# Altium PCB radio_pcb.PcbDoc
Units mil, origin at the board's own origin, x right, y up, seen from the top; angles counter-clockwise.
Board outline 3150 x 1770 mil, 2 copper layers (Top Layer, Bottom Layer); 49 components, 48 nets, 274 pads, 37 vias.
Unrouted connection lines stored in the file: 64.
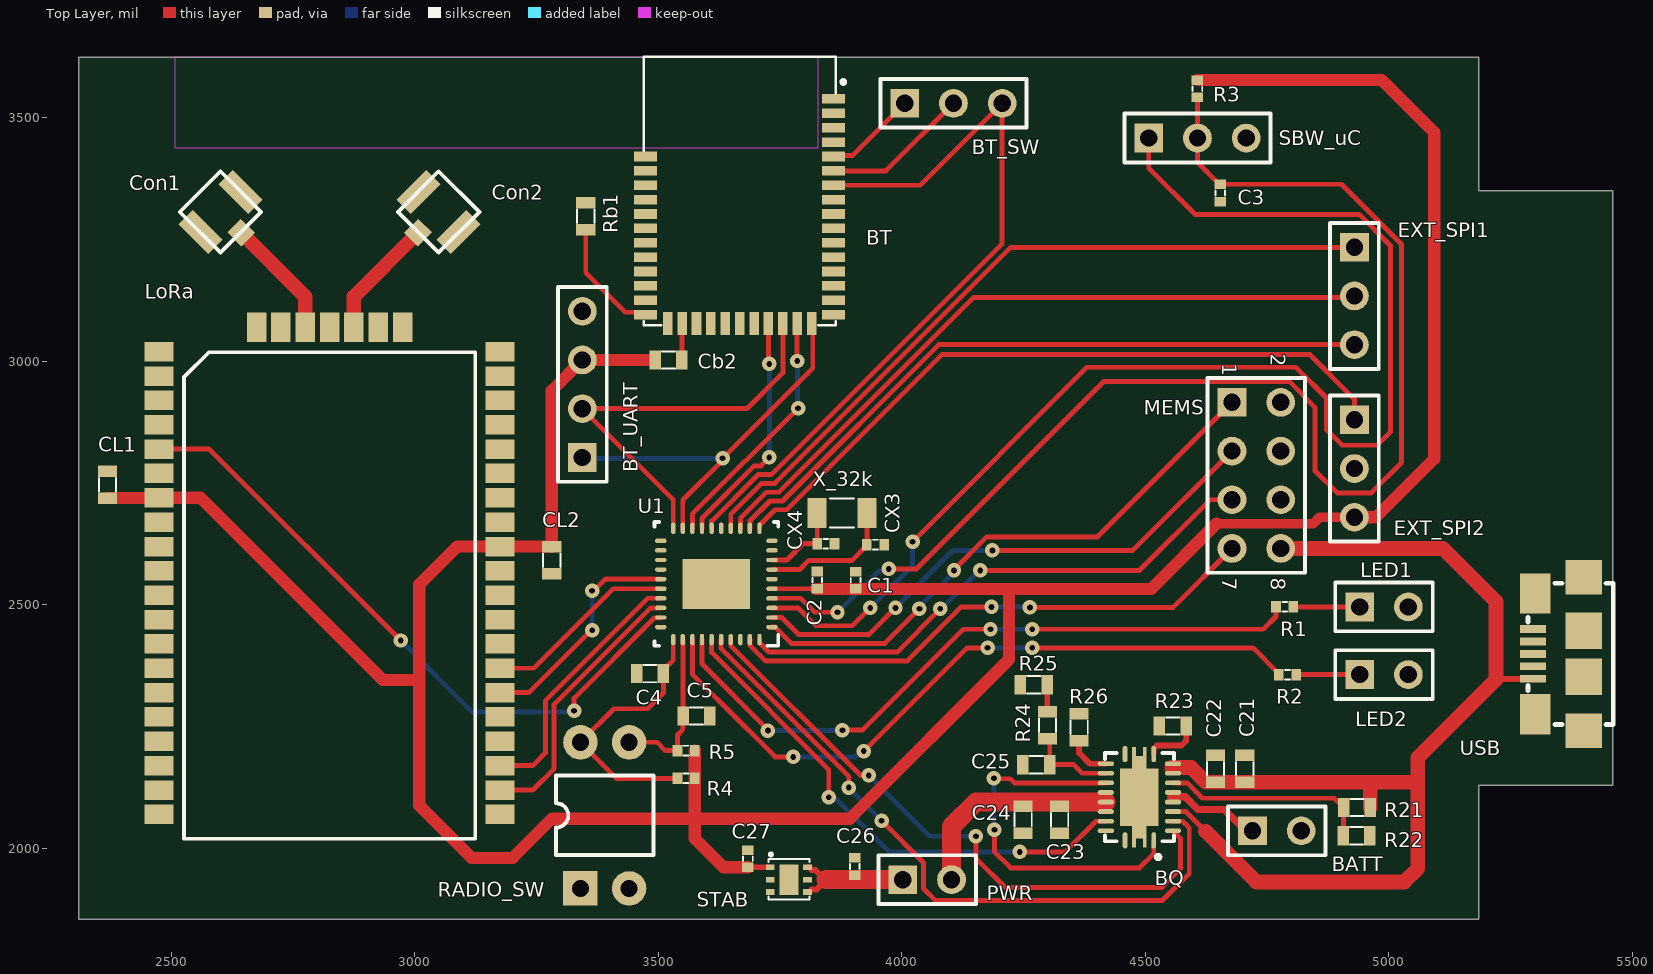
[diagram p0: Top Layer view]
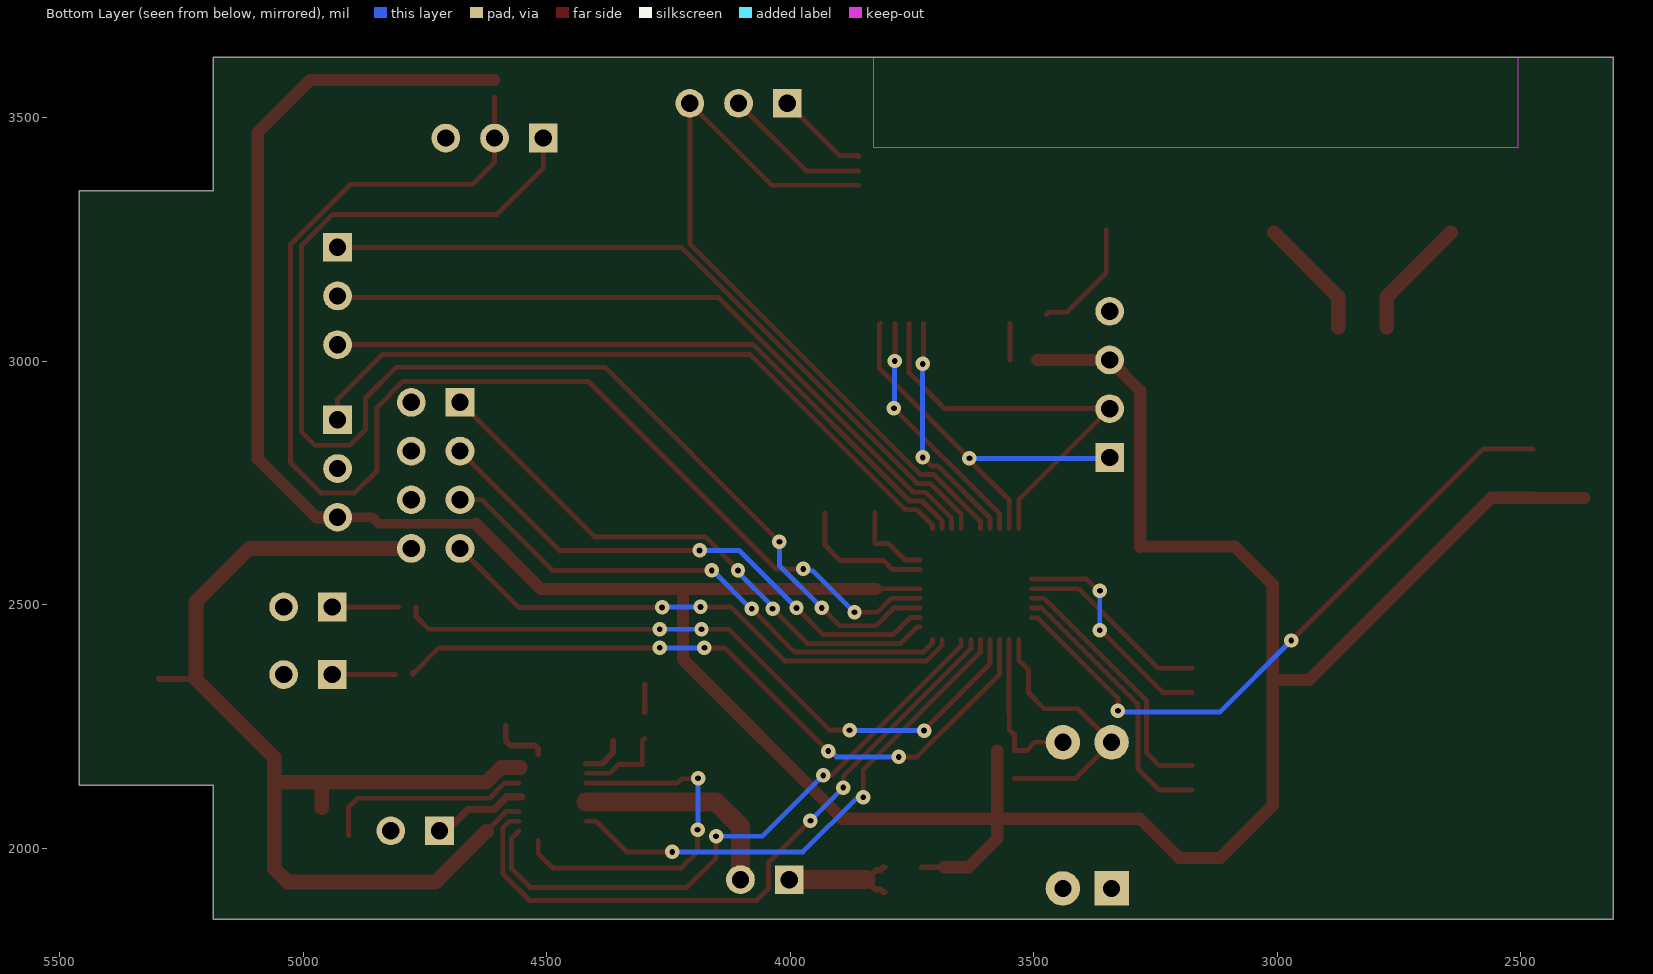
[diagram p1: Bottom Layer view, seen from below]

## Layer stack, top to bottom
Top Solder: solder mask 0.4, Solder Resist, Dk 3.5
Top Layer: signal copper 1.4
Dielectric 1: dielectric 12.6, FR-4, Dk 4.8
Bottom Layer: signal copper 1.4
Bottom Solder: solder mask 0.4, Solder Resist, Dk 3.5

## Board outline
2310,3625 2310,1855 5185,1855 5185,2130 5460,2130 5460,3350 5185,3350 5185,3625

## Design rules (kind name [scope] priority, off if disabled: settings)
Clearance [All] p1: gap=8 ignorepadtopadclearanceinfootprint=FALSE except(0: Arc-Hole Track-Hole SMDPad-Hole THPad-Hole Via-Hole Fill-Hole Poly-Hole Region-Hole Text-Hole)
PolygonConnect [All] p1: connectstyle=Direct reliefconductorwidth=10 reliefentries=4 polygonreliefangle="90 Angle" airgapwidth=10
RoomDefinition uC_radio [InComponentClass('uC_radio')] p1: confinementstyle=ConfineOut formatcopy=TRUE lockcomponents=FALSE outline 5921,4004 6604,4004 6604,4432 5921,4432
RoomDefinition radio [InComponentClass('radio')] p2: confinementstyle=ConfineOut formatcopy=TRUE lockcomponents=FALSE outline 6721,3759 7971,3759 7971,4449 6721,4449
RoomDefinition pwr_supply [InComponentClass('pwr_supply')] p3: confinementstyle=ConfineOut formatcopy=TRUE lockcomponents=FALSE outline 5724,3616 6669,3616 6669,3936 5724,3936
RoutingVias [All] p1: holewidth=11.81 width=29.53 viastyle="Through Hole" minholewidth=11.81 minwidth=29.53 maxholewidth=28 maxwidth=50
SolderMaskExpansion [All] p1: expansion=4
Width [All] p1: maxlimit=50 minlimit=10 preferedwidth=10 minimp=50.000000 maximp=50.000000 favimp=50.000000
30 further rules are at their usual default settings.

## Classes and differential pairs
component class uC_radio: C1 C2 C3 C4 C5 CX3 CX4 EXT_SPI1 EXT_SPI2 LED1 LED2 MEMS R1 R2 R3 R4 R5 RADIO_SW SBW_uC U1 X_32k
component class pwr_supply: BATT BQ C21 C22 C23 C24 C25 C26 C27 PWR R21 R22 R23 R24 R25 R26 STAB USB
component class radio: BT BT_SW BT_UART Cb2 CL1 CL2 Con1 Con2 LoRa Rb1

## Components (designator, comment, footprint, x,y, rotation, side; value= is the part's Value field where it differs from the comment)
BATT "Batt" HDR1X2 4720,2036.21 r0 top
BQ "BQ24070" BQ24070 4487.78,2105.23 r90 top
BT "BL652_Solder_PAD_P39" XCVR_BL652-SA-01 3667,3350 r0 top
BT_SW "" HDR1X3 4006,3530 r0 top
BT_UART "Header 4" HDR1X4 3344,2803 r90 top
C1 "10u" 402 3905,2550.72 r270 top
C2 "100n" 402 3826,2551 r270 top
C3 "1n" 402 4654,3346 r90 top
C4 "C" 603 3483,2359 r180 top
C5 "C" 603 3578.42,2272 r0 top
C21 "10u" 603 4704,2163.77 r90 top
C22 "0.1u" 603 4644,2163.77 r90 top
C23 "0.1u" 603 4324,2058.77 r90 top
C24 "10u" 603 4249,2058.77 r90 top
C25 "10n" 603 4276,2172 r0 top
C26 "10u" 402 3903,1963 r270 top
C27 "10u" 402 3684,1979 r270 top
Cb2 "1u" 603 3521,3003 r0 top
CL1 "1u" 603 2369,2747 r90 top
CL2 "1u" 603 3281,2592 r90 top
Con1 "RFL" IPEX 2600.98,3307.09 r315 top
Con2 "RFH" IPEX 3049,3307.09 r225 top
CX3 "12p" 402 3946,2624 r180 top
CX4 "12p" 402 3844,2626 r180 top
EXT_SPI1 "" HDR1X3 4929.21,3234.41 r270 top locked
EXT_SPI2 "" HDR1X3 4929.21,2880.08 r270 top locked
LED1 "Header 2" HDR1X2 4940,2496 r0 top
LED2 "Header 2" HDR1X2 4940,2357 r0 top
LoRa "LORA module" RN2483 2825,2570 r0 top
MEMS "Header 4X2" HDR2X4 4677.88,2916 r270 top
PWR "" HDR1X2 4002,1936 r0 top
R1 "R" 402 4786,2496 r0 top
R2 "R" 402 4792,2357 r0 top
R3 "47k" 402 4607,3560.04 r90 top
R4 "R" 402 3557,2144 r0 top
R5 "R" 402 3557,2201 r0 top
R21 "R" 603 4934.56,2084.21 r0 top
R22 "R" 603 4933.56,2026.21 r0 top
R23 "10k" 603 4556.44,2251.33 r0 top
R24 "2k7" 603 4299,2253 r270 top
R25 "33k" 603 4271,2336 r0 top
R26 "10k" 603 4364,2248.89 r270 top
RADIO_SW "DIPS-D02" DIPS-02 3340,1918 r90 top
Rb1 "R" 603 3351,3298 r270 top
SBW_uC "Header 3" HDR1X3 4507,3458.76 r0 top
STAB "LP5912" WSON-6 3768,1936 r0 top
U1 "MSP430FR2155TRHA" RHA0040E_NV 3619.16,2543.17 r180 top value=Value
USB "USB Micro Type B" USB_Micro-B 5295.67,2399.45 r90 top
X_32k "CRYST_32k768" "CRYST 32.768 kHz" 3877,2689 r180 top

## Footprints (in the part's own frame and the unit in brackets; to place one, negate y for a bottom-side part, rotate by r counter-clockwise, add the part's x,y. Pads: shape width x height; smd on the part's side, far side on the other; paste and mask are expansions set on the pad)
402 [mm]
  rect 0.5x0.6 smd: 1(-0.45,0) 2(0.45,0)
  silkscreen extent -0.13,-0.25 0.13,0.25
603 [mm]
  rect 0.6x1 smd: 1(-0.7,0) 2(0.7,0)
  silkscreen extent -0.35,-0.45 0.35,0.45
BQ24070 [mm]
  oval 0.85x0.25 smd: 1(-2.25,-0.75) 10(2.25,-0.75) 11(2.25,0.75) 20(-2.25,0.75)
  oval 0.25x0.85 smd: 2(-1.75,-1.75) 3(-1.25,-1.75) 4(-0.75,-1.75) 5(-0.25,-1.75) 6(0.25,-1.75) 7(0.75,-1.75) 8(1.25,-1.75) 9(1.75,-1.75) 12(1.75,1.75) 13(1.25,1.75) 14(0.75,1.75) 15(0.25,1.75) 16(-0.25,1.75) 17(-0.75,1.75) 18(-1.25,1.75) 19(-1.75,1.75)
  rect 0.9x0.2 smd: 21(-2.175,-0.275) 21(-2.175,0.275) 21(2.175,-0.275) 21(2.175,0.275)
  rect 0.7x0.75 smd: 21(-1.8,0) 21(1.8,0)
  rect 3x2 smd: 21(0,0)
  silkscreen extent -3.21,-1.8 2.3,1.8
"CRYST 32.768 kHz" [mm]
  rect 1x1.55 smd: 1(-1.3,0) 2(1.3,0)
  silkscreen extent -0.64,-0.76 0.64,0.76
DIPS-02 [mm]
  rect 1.8x1.8 / inner rect 2.5x1.2 / far side rect 1.8x1.8 hole 0.9: 1(0,0)
  round 1.8 / inner oval 2.5x1.2 / far side round 1.8 hole 0.9: 2(0,-2.54) 3(7.62,-2.54) 4(7.62,0)
  silkscreen extent 1.73,-3.81 5.89,1.27
HDR1X2 [mm] "Connector; Header; 2 Position"
  rect 1.5x1.5 hole 0.9: 1(0,0)
  round 1.5 hole 0.9: 2(2.54,0)
  silkscreen extent -1.27,-1.27 3.81,1.27
HDR1X3 [mm] "Connector; Header; 3 Position"
  rect 1.5x1.5 hole 0.9: 1(0,0)
  round 1.5 hole 0.9: 2(2.54,0) 3(5.08,0)
  silkscreen extent -1.27,-1.27 6.35,1.27
HDR1X4 [mm] "Connector; Header; 4 Position"
  rect 1.5x1.5 hole 0.9: 1(0,0)
  round 1.5 hole 0.9: 2(2.54,0) 3(5.08,0) 4(7.62,0)
  silkscreen extent -1.27,-1.27 8.89,1.27
HDR2X4 [mm] "Connector; Header; 4x2 Position"
  rect 1.5x1.5 hole 0.9: 1(0,0)
  round 1.5 hole 0.9: 2(0,2.54) 3(2.54,0) 4(2.54,2.54) 5(5.08,0) 6(5.08,2.54) 7(7.62,0) 8(7.62,2.54)
  silkscreen extent -1.27,-1.27 8.89,3.81
IPEX [mm]
  rect 1.05x1 smd: 1(1.525,0)
  rect 2.2x1.05 smd: 2(0,1.475) 3(0,-1.475)
  silkscreen extent -1.5,-1.5 1.5,1.5
RHA0040E_NV [mm]
  oval 0.6x0.23 smd paste+0 mask+0.076: 1(-2.9,2.25) 2(-2.9,1.75) 3(-2.9,1.25) 4(-2.9,0.75) 5(-2.9,0.25) 6(-2.9,-0.25) 7(-2.9,-0.75) 8(-2.9,-1.25) 9(-2.9,-1.75) 10(-2.9,-2.25) 21(2.9,-2.25) 22(2.9,-1.75) 23(2.9,-1.25) 24(2.9,-0.75) 25(2.9,-0.25) 26(2.9,0.25) 27(2.9,0.75) 28(2.9,1.25) 29(2.9,1.75) 30(2.9,2.25)
  oval 0.23x0.6 smd paste+0 mask+0.076: 11(-2.25,-2.9) 12(-1.75,-2.9) 13(-1.25,-2.9) 14(-0.75,-2.9) 15(-0.25,-2.9) 16(0.25,-2.9) 17(0.75,-2.9) 18(1.25,-2.9) 19(1.75,-2.9) 20(2.25,-2.9) 31(2.25,2.9) 32(1.75,2.9) 33(1.25,2.9) 34(0.75,2.9) 35(0.25,2.9) 36(-0.25,2.9) 37(-0.75,2.9) 38(-1.25,2.9) 39(-1.75,2.9) 40(-2.25,2.9)
  rect 3.52x2.62 smd paste-1.747 mask+0: 41(0,0)
  silkscreen extent -3.22,-3.22 3.22,3.22, body extent 0,0 0.25,0.25, height 0.25
RN2483 [mil]
  rect 60x40 smd: 1(350,-500) 2(350,-450) 3(350,-400) 4(350,-350) 5(350,-300) 6(350,-250) 7(350,-200) 8(350,-150) 9(350,-100) 10(350,-50) 11(350,0) 12(350,50) 13(350,100) 14(350,150) 15(350,200) 16(350,250) 17(350,300) 18(350,350) 19(350,400) 20(350,450) 28(-350,450) 29(-350,400) 30(-350,350) 31(-350,300) 32(-350,250) 33(-350,200) 34(-350,150) 35(-350,100) 36(-350,50) 37(-350,0) 38(-350,-50) 39(-350,-100) 40(-350,-150) 41(-350,-200) 42(-350,-250) 43(-350,-300) 44(-350,-350) 45(-350,-400) 46(-350,-450) 47(-350,-500)
  rect 40x60 smd: 21(150,500) 22(100,500) 23(50,500) 24(0,500) 25(-50,500) 26(-100,500) 27(-150,500)
  silkscreen extent -299,-550 299,449
USB_Micro-B [mm]
  rect 0.4x1.35 smd: 1(-1.3,0) 2(-0.65,0) 3(0,0) 4(0.65,0) 5(1.3,0)
  rect 1.8x1.9 smd: SH(-4,-2.65) SH(4,-2.65)
  rect 2.1x1.6 smd: SH(-3.15,-0.127) SH(3.15,-0.127)
  rect 1.9x1.9 smd: SH(-1.2,-2.65) SH(1.2,-2.65)
  silkscreen extent -3.68,-4.19 3.68,0.25
WSON-6 [mm]
  rect 0.45x0.3 smd: 1(-0.975,0.65) 2(-0.975,0) 3(-0.975,-0.65) 4(0.975,-0.65) 5(0.975,0) 6(0.975,0.65)
  rect 1x1.6 smd: 7(0,0)
  silkscreen extent -1.07,-1.04 1.07,1.4
XCVR_BL652-SA-01 [mm]
  rect 1.2x0.5 smd: 1(4.9,4.8) 2(4.9,4.05) 3(4.9,3.3) 4(4.9,2.55) 5(4.9,1.8) 6(4.9,1.05) 7(4.9,0.3) 8(4.9,-0.45) 9(4.9,-1.2) 10(4.9,-1.95) 11(4.9,-2.7) 12(4.9,-3.45) 13(4.9,-4.2) 14(4.9,-4.95) 15(4.9,-5.7) 16(4.9,-6.45) 28(-4.9,-6.45) 29(-4.9,-5.7) 30(-4.9,-4.95) 31(-4.9,-4.2) 32(-4.9,-3.45) 33(-4.9,-2.7) 34(-4.9,-1.95) 35(-4.9,-1.2) 36(-4.9,-0.45) 37(-4.9,0.3) 38(-4.9,1.05) 39(-4.9,1.8)
  rect 0.5x1.2 smd: 17(3.75,-6.9) 18(3,-6.9) 19(2.25,-6.9) 20(1.5,-6.9) 21(0.75,-6.9) 22(0,-6.9) 23(-0.75,-6.9) 24(-1.5,-6.9) 25(-2.25,-6.9) 26(-3,-6.9) 27(-3.75,-6.9)
  silkscreen extent -5,-7 5.51,7

## Part data
BATT PWR: library part "Header 2", "Header, 2-Pin", LatestRevisionDate=17-Jul-2002, LatestRevisionNote="Re-released for DXP Platform.", Publisher="Altium Limited"
BT: "BL652 Solder PAD", E Number=?
BT_SW EXT_SPI1 EXT_SPI2: library part "Header 3", "Header, 3-Pin", LatestRevisionDate=17-Jul-2002, LatestRevisionNote="Re-released for DXP Platform.", Publisher="Altium Limited"
BT_UART: "Header, 4-Pin", LatestRevisionDate=17-Jul-2002, LatestRevisionNote="Re-released for DXP Platform.", Publisher="Altium Limited"
C1 C2 C3 C21 C22 C23 C24 C25 C26 C27 Cb2 CL1 CL2 CX3 CX4: library part C, "Capacitor"
C4 C5: "Capacitor"
Con1 Con2: library part IPEX/U.FL, "SMA PCB Edge Receptacle"
LED1 LED2: "Header, 2-Pin", LatestRevisionDate=17-Jul-2002, LatestRevisionNote="Re-released for DXP Platform.", Publisher="Altium Limited"
LoRa: library part Lora
MEMS: "Header, 4-Pin, Dual row", LatestRevisionDate=17-Jul-2002, LatestRevisionNote="Re-released for DXP Platform.", Publisher="Altium Limited"
R1 R2 R4 R5 R21 R22 Rb1: "Resistor"
R3 R23 R24 R25 R26: library part R, "Resistor"
SBW_uC: "Header, 3-Pin", LatestRevisionDate=17-Jul-2002, LatestRevisionNote="Re-released for DXP Platform.", Publisher="Altium Limited"
U1: "Imported", Manufacturer="Texas Instruments", PartNumber=MSP430FR2355TRHAR, RefDes=RefDes, TYPE=TYPE
USB: library part USB_Micro_TypeB, "Connector SMD USB Micro Type B middle mount", Manufacturer 1="Molex Inc", Package / Case=SMD, Supplier Part Number 1=WM17142CT-ND, SCDType=undef, Supplier 1=Digi-Key

## Via types
v1: diameter 29.53, hole 11.81, Top Layer to Bottom Layer, 37 vias

## Nets (pads, with @x,y where several pads share a name; then routed paths per layer and width w, separated by ;. In a path a pad name is that pad's centre, name@x,y a point inside that pad or via, vN(x,y) a via of type N, cw(c..) or ccw(c..) an arc to the next point about the centre after c; other vN are vias at no path point)
BATT: BATT.1 BQ.5 BQ.6 | length 197
  Top Layer w15: 4552,2106.21 4581.88,2106.21 4607.88,2080.21 4662,2080.21 BATT.1@4706,2036.21
  Top Layer w25: BATT.1@4706,2036.21 BATT.1
BQ_PG: BQ.18 U1.35 | length 1064.9
  Top Layer w10: U1.35 3609.32,2402.68 3850,2162 v1(3850,2105.23) ; v1(4242,1993) 4335.67,1993 4398.68,2056.01 BQ.18
  Bottom Layer w10: v1(3850,2105.23) 3861.51,2105.23 3973.74,1993 v1(4242,1993)
BQ_STAT1: BQ.2 U1.37 | length 1268
  Top Layer w10: U1.37 3648.69,2416.39 3915.07,2150 v1(3932,2150) ; v1(4152,2025) 4152,1980 4211.79,1920.21 4534,1920.21 4572,1958.21 4572,2021.01 BQ.2
  Bottom Layer w10: v1(3932,2150) 4057,2025 v1(4152,2025)
BQ_STAT2: BQ.3 U1.36 | length 1394.8
  Top Layer w10: U1.36 3629,2410 3891,2148 v1(3891,2125) ; v1(3958.44,2057) 4044.53,1970.91 4044.53,1917.47 4068.53,1893.47 4535.26,1893.47 4590,1948.21 4590,2042.21 4576.2,2056.01 BQ.3
  Bottom Layer w10: v1(3891,2125) 3891,2124.44 v1(3958.44,2057)
BT_CTS: BT.18 U1.18 | length 511.8
  Top Layer w10: U1.18 3569.94,2686.94 v1(3787,2904) ; v1(3785,3001) 3785.06,3001.06 BT.18 BT.18
  Bottom Layer w10: v1(3785,3001) 3786,3000 3786,2905 v1(3787,2904)
BT_MSP_RXD: BT.19 BT_UART.2 U1.20 | length 867
  Top Layer w10: U1.20 3530.57,2716.43 BT_UART.2 3682.15,2903 3755.76,2976.61 3755.76,3078.17 BT.19
BT_MSP_TXD: BT.17 BT_UART.1 U1.19 | length 821.3
  Top Layer w10: U1.19 3550.26,2715.47 3632,2797.21 v1(3632,2801) 3817,2986 3817,3075.98 BT.17
  Bottom Layer w10: BT_UART.1 3346,2801 v1(3632,2801)
BT_RESET: BT.7 BT_SW.3 U1.16 | length 1551.5
  Top Layer w10: U1.16 3609.32,2672.23 3704.59,2767.5 3731.76,2767.5 4206,3241.74 BT_SW.3 4037.81,3361.81 BT.7
BT_RTS: BT.20 U1.17 | length 487
  Top Layer w10: U1.17 3589.63,2678 3697.13,2785.5 3710.5,2785.5 v1(3728,2803) ; BT.20 3726.06,2996.94 v1(3728,2995)
  Bottom Layer w10: v1(3728,2803) v1(3728,2995)
BT_SWDCLK: BT.6 BT_SW.2 | length 303.5
  Top Layer w10: BT.6 3967.34,3391.34 BT_SW.2
BT_SWDIO: BT.5 BT_SW.1 | length 191.3
  Top Layer w10: BT.5 3861.58,3422.54 3898.54,3422.54 BT_SW.1
EXT_SPI_CLK: EXT_SPI1.2 U1.13 | length 1470.6
  Top Layer w10: U1.13 3668.37,2678.1 3721.77,2731.5 3747.5,2731.5 4147,3131 4925.8,3131 EXT_SPI1.2
EXT_SPI_MISO: EXT_SPI2.1 U1.11 | length 1453.4
  Top Layer w10: U1.11 3707.74,2663.68 3739.56,2695.5 3763.74,2695.5 4082.24,3014 4838,3014 4929.21,2922.79 EXT_SPI2.1
EXT_SPI_MOSI: EXT_SPI1.3 U1.12 | length 1406.1
  Top Layer w10: U1.12 3688.06,2672.33 3729.22,2713.5 3754.96,2713.5 4075.87,3034.41 EXT_SPI1.3
EXT_SPI_STE: EXT_SPI1.1 U1.14 | length 1536.4
  Top Layer w10: U1.14 3648.69,2686.14 3712.04,2749.5 3739.22,2749.5 4223.93,3234.21 4929.01,3234.21 EXT_SPI1.1
GND: BATT.2 BQ.11 BQ.19 BQ.20 BQ.21 BT.1 BT.16 BT.27 BT.39 BT_UART.4 C1.1 C2.1 C3.1 C4.2 C5.2 C21.2 C22.2 C23.1 C24.1 C25.1 C26.1 C27.1 CL1.2 CL2.1 Con1.2 Con1.3 Con2.2 Con2.3 CX3.1 CX4.1 EXT_SPI2.2 LED1.2 LED2.2 LoRa.1 LoRa.8 LoRa.11 LoRa.20 LoRa.21 LoRa.22 LoRa.24 LoRa.26 LoRa.27 LoRa.28 LoRa.33 LoRa.41 LoRa.47 MEMS.2 MEMS.4 MEMS.6 R22.2 R23.1 R25.1 R26.1 RADIO_SW.1 RADIO_SW.2 Rb1.1 SBW_uC.3 STAB.2 STAB.5 STAB.7 U1.6 U1.41 USB.5 USB.SH
LED1: R1.1 U1.34 | length 1403.1
  Top Layer w10: U1.34 3589.63,2379.37 3725,2244 v1(3725,2242) ; v1(3878,2243) 3919,2243 4126,2450 v1(4182,2450) ; v1(4268,2450) 4742,2450 4768.28,2476.28 R1.1
  Bottom Layer w10: v1(3725,2242) 3877,2242 v1(3878,2243) ; v1(4182,2450) v1(4268,2450)
LED2: R2.1 U1.33 | length 1464.6
  Top Layer w10: U1.33 3569.94,2357.79 3623.05,2304.69 3623.17,2304.69 3630.79,2297.07 3630.79,2296.95 3739.74,2188 v1(3777,2188) ; v1(3922,2200) 4134,2412 v1(4176,2412) ; v1(4268,2412) 4721.25,2412 4774.28,2358.97 R2.1 ; R2.1@4773.47,2361.84 R2.1@4775.44,2361.84
  Bottom Layer w10: v1(3777,2188) 3904.72,2188 3916.72,2200 v1(3922,2200) ; v1(4176,2412) v1(4268,2412)
LORA_CTS: LoRa.3 U1.27 | length 535.1
  Top Layer w10: LoRa.3 3242,2170 3268,2196 3268,2303.19 3478.46,2513.65 U1.27
LORA_MSP_RXD: LoRa.6 U1.25 | length 474.7
  Top Layer w10: LoRa.6 3234,2320 3362,2448 v1(3364.5,2448) ; v1(3364,2529) 3367,2529 3391.02,2553.02 U1.25
  Bottom Layer w10: v1(3364,2529) 3364.25,2528.75 3364.25,2448.25 v1(3364.5,2448)
LORA_MSP_TXD: LoRa.7 U1.26 | length 397.6
  Top Layer w10: LoRa.7 3244.26,2370 3407.59,2533.33 U1.26
LORA_RESET: LoRa.32 U1.29 | length 1344.9
  Top Layer w10: LoRa.32 2578,2820 v1(2971,2427) ; v1(3327,2283) 3327,2308.68 3492.13,2473.8 3504.51,2473.8 U1.29
  Bottom Layer w10: v1(2971,2427) 3118,2280 v1@3324,2280
LORA_RTS: LoRa.2 U1.28 | length 562.1
  Top Layer w10: LoRa.2 3242,2120 3286,2164 3286,2295.73 3484.23,2493.96 U1.28
NetBQ_7: BQ.7 R21.1 R22.1 | length 429.7
  Top Layer w10: BQ.7 4585.86,2134.75 4617.4,2103.21 4888,2103.21 R21.1 4907,2027.21 R22.1
NetBQ_10: BQ.10 R23.2 | length 114.4
  Top Layer w12: BQ.10 4517.31,2204.52 4524,2211.21 4574,2211.21 4584,2221.21 R23.2
NetBQ_12: BQ.12 R26.2 | length 89.1
  Top Layer w12: R26.2 4364,2196.21 4386.09,2174.12 BQ.12
NetBQ_13: BQ.13 C25.2 R24.2 | length 178.6
  Top Layer w10: R24.2 4303.56,2220.88 C25.2@4303.56,2172.21 ; C25.2@4303,2172.21 C25.2@4303.56,2172.21 ; C25.2 C25.2@4303.56,2172.21 ; BQ.13 4370.77,2154.44 4353,2172.21 C25.2@4303.56,2172.21
NetBT_26: BT.26 Cb2.2 | length 76.3
  Top Layer w10: Cb2.2@3548.83,3002.72 Cb2.2 3548.72,3003.17 3548.72,3078.18 BT.26 BT.26@3549.17,3078.07
NetBT_28: BT.28 Rb1.2 | length 247.1
  Top Layer w10: Rb1.2 3351,3182 3432.09,3100.91 3469.24,3100.91 BT.28
NetCon1_1: Con1.1 LoRa.25 | length 249.1
  Top Layer w29.53: Con1.1 2775,3133.07 LoRa.25
NetCon2_1: Con2.1 LoRa.23 | length 249.1
  Top Layer w29.53: LoRa.23 2875,3133.09 Con2.1
NetLED1_1: LED1.1 R1.2 | length 136.3
  Top Layer w10: R1.2 LED1.1
NetLED2_1: LED2.1 R2.2 | length 130.3
  Top Layer w10: R2.2 LED2.1
NetR24_1: R24.1 R25.2 | length 55.6
  Top Layer w12: R25.2 4298.56,2281 R24.1
PS_VCC: BQ.4 BQ.8 BQ.9 C21.1 C22.1 MEMS.8 R21.2 USB.1 | length 2315.8
  Top Layer w10: BQ.4 4583.4,2075.7 4623.55,2035.55
  Top Layer w12: 5220,2347.21 5221.06,2348.27 USB.1
  Top Layer w30: 4554,2166.21 4594,2166.21 4624,2136.21 C22.1 C21.1 5059,2136.21 ; 4623.55,2035.55 4727.88,1931.21 5032,1931.21 5059,1958.21 5059,2136.21 ; MEMS.8 5111,2616 5220,2507 5220,2347.21 5059,2186.21 5059,2136.21 ; R21.2 4962.12,2130.33
RADIO_SEL1: C5.1 R5.1 RADIO_SW.3 U1.32 | length 339
  Top Layer w10: RADIO_SW.3 3497.44,2218 3514.44,2201 R5.1 3539.28,2233.02 3550.26,2244 3550.26,2275.26 3550.44,2275.44 3550.35,2275.53 3550.35,2428.91 U1.32
RADIO_SEL2: C4.1 R4.1 RADIO_SW.4 U1.31 | length 560.3
  Top Layer w10: U1.31 3530.57,2386.89 3510.56,2366.87 C4.1 3510.56,2319.57 3477.96,2286.98 3408.98,2286.98 RADIO_SW.4 3414,2144 R4.1
RST_SBWTDIO: C3.2 R3.1 SBW_uC.2 U1.4 | length 2768.4
  Top Layer w10: U1.4 3792.53,2513.65 3821.17,2485 v1(3868,2485) ; v1(3973,2574) 4030,2574 4415,2959 4795.03,2959 4848,2906.03 4848,2776 4894,2730 4964,2730 5026,2792 5026,3240.52 4902.81,3363.72 C3.2 4652.03,3363.72 4607,3408.75 SBW_uC.2 R3.1
  Bottom Layer w10: v1(3868,2485) 3953.26,2570.26 3969.26,2570.26 v1(3973,2574)
SBWTCK: SBW_uC.1 U1.3 | length 2655.9
  Top Layer w10: U1.3 3786.76,2493.96 3823.48,2457.24 3898.24,2457.24 v1(3935,2494) ; v1(4022,2630) 4380,2988 4809,2988 4872,2925 4872,2859.86 4903.86,2828 4976.24,2828 5003,2854.76 5003,3238.07 4939.07,3302 4602,3302 4507,3397 SBW_uC.1
  Bottom Layer w10: v1(3935,2494) 4022,2581 v1(4022,2630)
SENS_SPI_CLK: MEMS.1 U1.1 | length 1168.8
  Top Layer w10: U1.1 3739.67,2454.59 3773.02,2421.24 3965.24,2421.24 v1(4036,2492) ; v1(4107,2571) 4107,2572.33 4174.5,2639.83 4401.72,2639.83 MEMS.1
  Bottom Layer w10: v1(4036,2492) 4036,2496 4107,2567 v1(4107,2571)
SENS_SPI_MISO: MEMS.7 U1.39 | length 1110.6
  Top Layer w10: U1.39 3688.53,2428.53 3688.53,2416.14 3719.43,2385.24 4011.5,2385.24 4122.26,2496 v1(4184,2496) ; v1(4263,2495) 4556.88,2495 MEMS.7
  Bottom Layer w10: v1@4185,2495 4185.5,2495.5 4262.5,2495.5 v1(4263,2495)
SENS_SPI_MOSI: MEMS.5 U1.40 | length 1114.1
  Top Layer w10: U1.40 3707.74,2422.66 3727.17,2403.24 3990.24,2403.24 v1(4079,2492) ; v1(4161,2571) 4488,2571 4633,2716 MEMS.5
  Bottom Layer w10: v1(4079,2492) 4080.5,2492 4159.5,2571 v1(4161,2571)
SENS_SPI_STE: MEMS.3 U1.2 | length 1115.1
  Top Layer w10: U1.2 3753.72,2474.28 3788.76,2439.24 3932.28,2439.24 v1(3987,2493.96) ; v1(4186,2612.07) 4473.95,2612.07 MEMS.3
  Bottom Layer w10: v1(3987,2493.96) 4105.11,2612.07 v1(4186,2612.07)
VCC: BT_UART.3 C1.2 C2.2 C27.2 Cb2.1 CL1.1 CL2.2 EXT_SPI2.3 LoRa.12 LoRa.34 R3.2 R4.2 R5.2 STAB.1 U1.5 | length 6715.5
  Top Layer w10: U1.5 3733.38,2533.28 C2.2
  Top Layer w12: C27.2 3684.21,1961.5 3729.52,1961.5 STAB.1
  Top Layer w20: 4646,2667 4844.78,2667 4857.86,2680.08 EXT_SPI2.3
  Top Layer w25: CL1.1 2369.28,2719.72 2474.72,2719.72 LoRa.34 2559.92,2720 2933.92,2346 3009,2346 ; Cb2.1 BT_UART.3 3281,2940 CL2.2 3280.78,2619.78 3175.22,2619.78 LoRa.12 3087,2620 3009,2542 3009,2346 ; R5.2 R4.2 3574.72,2061 ; C27.2 3633.72,1961.28 3574.72,2020.28 3574.72,2061 ; C2.2@3824,2533 C1.2 4222,2533 ; R3.2 4985.24,3577.76 5093,3470 5093,2800 4973.08,2680.08 EXT_SPI2.3 ; 4646,2667 4512,2533 4222,2533 ; 3009,2346 3009,2088.28 3116.57,1980.72 3201.07,1980.72 3281.36,2061 3574.72,2061 ; 3574.72,2061 3893,2061 4220,2388 4220,2531 4222,2533
VCC_BQ: BQ.15 BQ.16 BQ.17 C23.2 C24.2 C26.2 PWR.1 PWR.2 STAB.4 STAB.6 | length 699.4
  Top Layer w12: STAB.4 3809.15,1910.41 3814.83,1916.09 3825.02,1916.09 3844.93,1936 ; STAB.6 3809.15,1961.59 3814.83,1955.91 3822.07,1955.91 3841.97,1936
  Top Layer w39.37: 3844.93,1936 PWR.1 ; PWR.2 4102,2045.03 4152.63,2095.66 4249,2095.66 4324,2095.66 4418.61,2095.66 BQ.16
VREF: BQ.1 BQ.14 | length 765.3
  Top Layer w10: v1@4189,2143.21 4222.56,2143.21 4231.02,2134.75 BQ.14 ; v1(4190,2038.21) 4190,1993.46 4223.25,1960.21 4488,1960.21 4517.31,1989.52 BQ.1
  Bottom Layer w10: v1@4189,2143.21 4189,2039.21 v1(4190,2038.21) v1@4191,2037.21
  other v1: 4189,2144
XTAL0: CX4.2 U1.8 X_32k.2 | length 170.1
  Top Layer w10: U1.8 3764.15,2592.39 3797.77,2626 CX4.2 3826.28,2688.54 X_32k.2
XTAL1: CX3.2 U1.7 X_32k.1 | length 282.4
  Top Layer w10: U1.7 3789.95,2572.7 3808.8,2591.56 3897.81,2591.56 3928.28,2622.03 CX3.2 3928.28,2688.9 X_32k.1
pads on no net: BT.2 BT.3 BT.4 BT.8 BT.9 BT.10 BT.11 BT.12 BT.13 BT.14 BT.15 BT.21 BT.22 BT.23 BT.24 BT.25 BT.29 BT.30 BT.31 BT.32 BT.33 BT.34 BT.35 BT.36 BT.37 BT.38 LoRa.4 LoRa.5 LoRa.9 LoRa.10 LoRa.13 LoRa.14 LoRa.15 LoRa.16 LoRa.17 LoRa.18 LoRa.19 LoRa.29 LoRa.30 LoRa.31 LoRa.35 LoRa.36 LoRa.37 LoRa.38 LoRa.39 LoRa.40 LoRa.42 LoRa.43 LoRa.44 LoRa.45 LoRa.46 STAB.3 U1.9 U1.10 U1.15 U1.21 U1.22 U1.23 U1.24 U1.30 U1.38 USB.2 USB.3 USB.4

## Polygon pours and split planes (outlines as drawn)
no net on Top Layer "Top Layer-No Net" (solid, pour order 0): 3768,3488

## Keep-outs
Top Layer:
  rectangle: 2507,3439 3828,3625
Bottom Layer:
  rectangle: 2506,3439 3828,3625

## Silkscreen, mask and mechanical layers (free items; w line width, h text height)
Mechanical 1:
  lines w10: 1313,-3756 2695,-3756 2695,-2419 1313,-2419 1313,-3756 ; 2311.1,1853.31 5185,1853.31 5185,2132.21 5460.71,2132.21 5460.71,3352.21 5185,3352.21 5185,3624.97 2311.1,3624.97 2311.1,1853.31

## Text inside footprints (layer, text, board x,y; h text height)
MEMS: Top Overlay "2" at 4757.88,3016 h30 r270; Top Overlay "1" at 4657.88,2996 h30 r270; Top Overlay "7" at 4657.88,2556 h30 r270; Top Overlay "8" at 4757.88,2556 h30 r270